# Altium PCB PCB.PcbDoc (part 1 of 2)
Units mil, origin at the board's own origin, x right, y up, seen from the top; angles counter-clockwise.
Board outline 10740 x 3770 mil, 2 copper layers (Top Layer, Bottom Layer); 124 components, 113 nets, 453 pads, 174 vias.
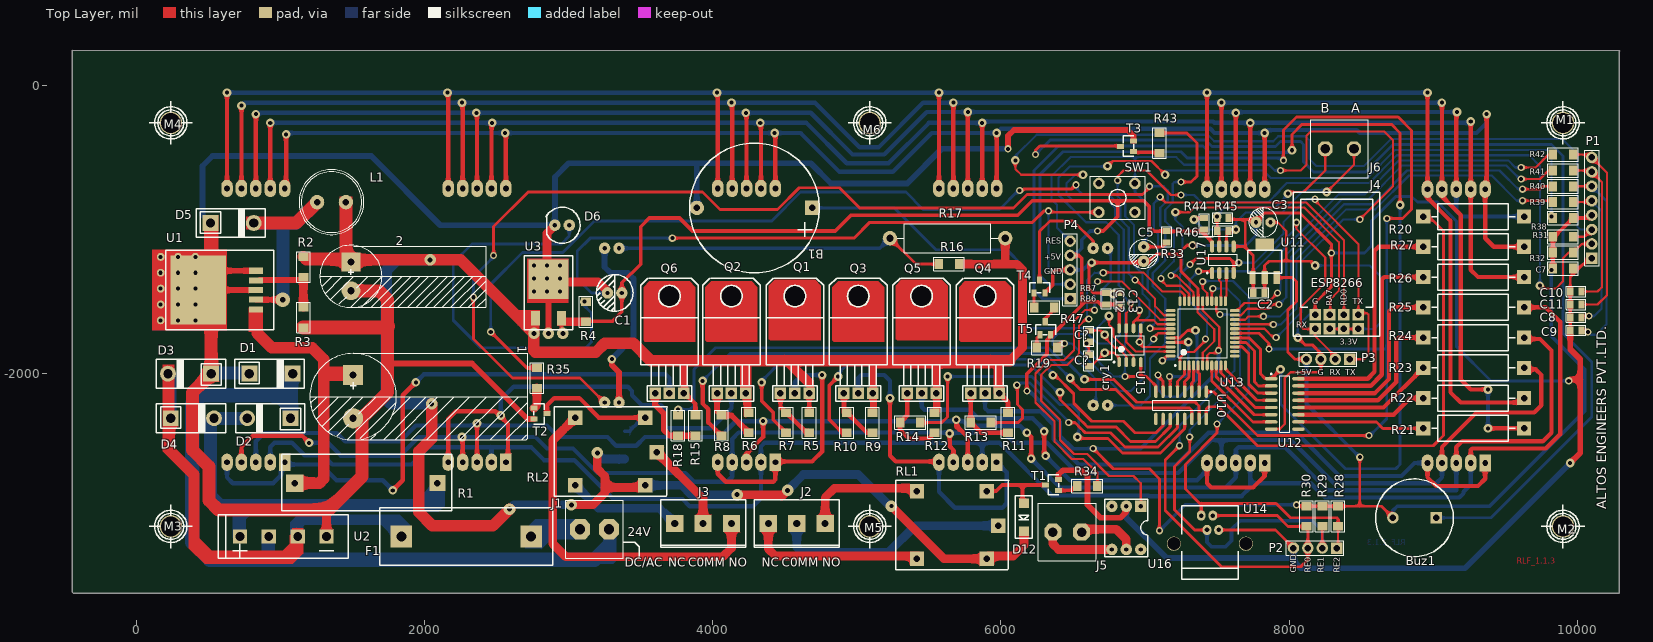
[diagram p0: Top Layer view]
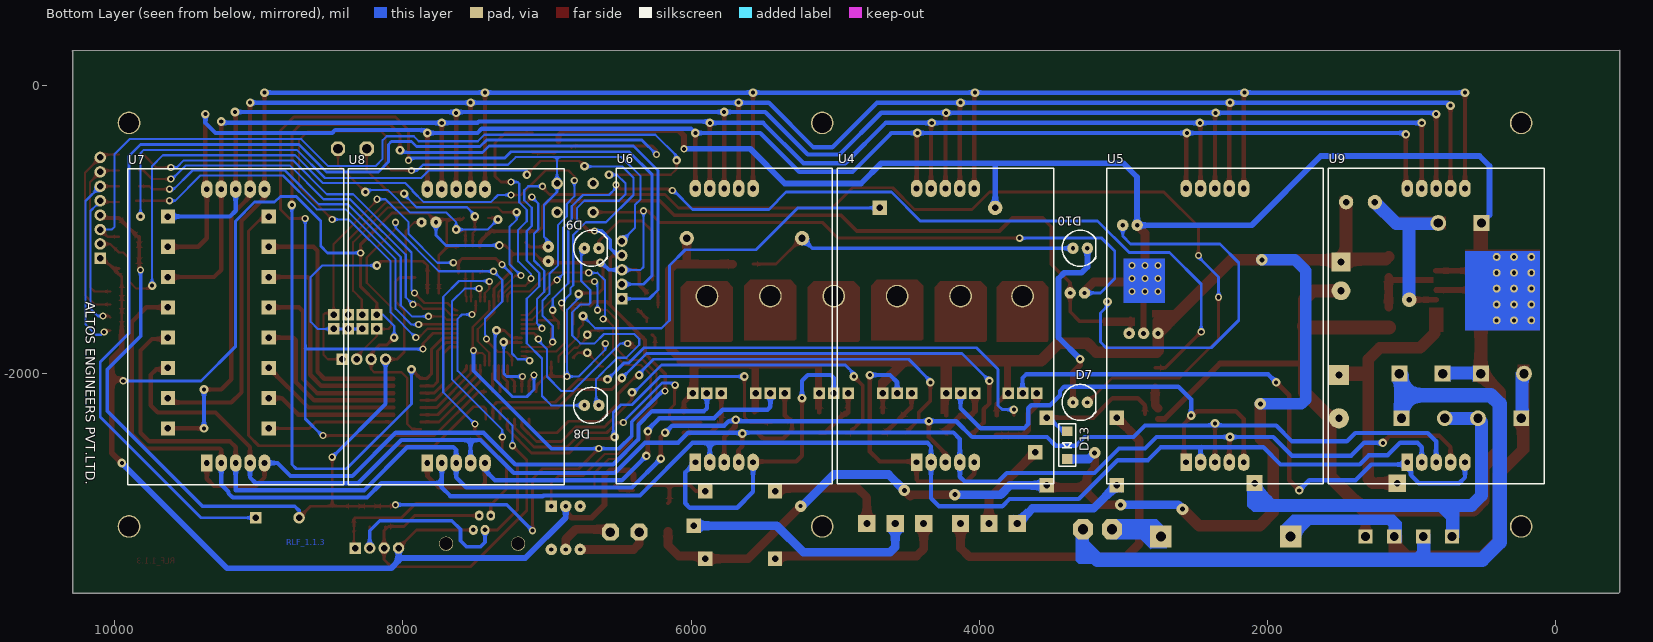
[diagram p1: Bottom Layer view, seen from below]

## Layer stack, top to bottom
Top Solder: solder mask 0.4, Solder Resist, Dk 3.5
Top Layer: signal copper 1.4
Dielectric 1: dielectric 12.6, FR-4, Dk 4.8
Bottom Layer: signal copper 1.4
Bottom Solder: solder mask 0.4, Solder Resist, Dk 3.5

## Board outline
-445,245 -445,-1740 -445,-3515 -435,-3525 9545,-3525 10290,-3525 10290,-2060 10290,235 10295,240

## Design rules (kind name [scope] priority, off if disabled: settings)
Clearance [All] p1: gap=20
PolygonConnect [All] p1: connectstyle=Relief reliefconductorwidth=10 reliefentries=4 polygonreliefangle="90 Angle" airgapwidth=10
RoutingVias [All] p1: holewidth=28 width=60 viastyle="Through Hole" minholewidth=25 minwidth=50 maxholewidth=28 maxwidth=60
SolderMaskExpansion [All] p1: expansion=4
UnpouredPolygon [All] p1: allowunpoured=FALSE
Width [All] p1: maxlimit=180 minlimit=10 preferedwidth=10
29 further rules are at their usual default settings.

## Classes and differential pairs
component class Sheet6: Buz1 C7 C8 C9 C10 C11 D12 D13 J2 J3 J4 J5 J6 P1 R34 R35 R39 R40 R41 R42 R43 R44 R45 R46 RL1 RL2 T1 T2 T3 U16 U17
component class Sheet1: 1 2 C1 D1 D2 D3 D4 D5 D6 D17 D18 F1 J1 L1 M1 M2 M3 M4 M5 M6 R1 R2 R3 R4 U1 U2 U3
component class Sheet2: Q1 Q2 Q3 R5 R6 R7 R8 R9 R10 U4 U5 U6
component class Sheet3: D7 D8 D9 D10 Q4 Q5 Q6 R11 R12 R13 R14 R15 R16 R17 R18 R19 R47 T4 T5 U7 U8 U9
component class Sheet4: C2 C3 R20 R21 R22 R23 R24 R25 R26 R27 U10 U11 U12
component class Sheet5: B1 C5 C12 C13 C? cry1 P2 P3 P4 P6 R28 R29 R30 R31 R32 R33 R38 SW1 U13 U14 U15

## Components (designator, comment, footprint, x,y, rotation, side; value= is the part's Value field where it differs from the comment)
1 "CAP" "Capacitor - 2200uF" 1505,-2160 r270 top
2 "CAP" Capacitor1000uF 1490,-1325 r270 top
B1 "3.3V Battery" CMOS_Battery_H 4290,-850 r180 top
Buz1 "Buzzer" Buzzer 8870,-3000 r180 top
C1 "Cap" CAP_220uF 3320,-1440 r180 top
C2 "Cap" RES0805 7790,-1440 r0 top
C3 "Cap" Capacitor10UF/63V#1 7820,-950 r180 top
C5 "Cap" Capacitor10UF/63V#2 6990,-1170 r270 top
C7 "Cap" 1206 9970,-1270 r180 top
C8 "Cap" RES0805 9990,-1610 r0 top
C9 "Cap" RES0805 9990,-1700 r0 top
C10 "Cap" RES0805 9990,-1430 r0 top
C11 "Cap" RES0805 9990,-1520 r0 top
C12 "Cap" RES0805 6730,-1480 r270 top
C13 "Cap" RES0805 6820,-1480 r270 top
C? "Cap" RES0805 6610,-1740 r270 top
C? "Cap" RES0805 6610,-1910 r90 top
cry1 "cry" Res_150mil 6720,-1780 r270 top
D1 "Diode 5822H" Diode#1 785,-2000 r0 top
D2 "Diode 5822H" Diode#2 1070,-2310 r180 top
D3 "Diode 5822H" Diode#2 520,-2000 r180 top
D4 "Diode 5822H" Diode#2 240,-2310 r0 top
D5 "Diode 5822H" Diode#2 515,-955 r0 top
D6 "LED" LED5MM 2955,-970 r180 top
D7 "LED" LED5MM 3300,-2200 r180 bottom locked
D8 "LED" LED5MM 6690,-2220 r180 bottom locked
D9 "LED" LED5MM 6690,-1130 r180 bottom locked
D10 "LED" LED5MM 3300,-1130 r180 bottom locked
D12 "DIODE-SS14" DO-214AC 6160,-3010 r90 top
D13 "DIODE-SS14" DO-214AC 3390,-2510 r90 bottom
F1 "FUSE" FUSE 2740,-3130 r180 top
J1 "Header2" Header2#1 3080,-3080 r0 top
J2 "Header" "HEADER AC SMALL" 4780,-3040 r180 top
J3 "Header" "HEADER AC SMALL" 4130,-3040 r180 top
J4 "ESP8266" ESP8266 8480,-1590 r0 top
J5 "Header2" Header2#2 6560,-3100 r180 top
J6 "Header2" Header2#3 8250,-440 r0 top
L1 "INDUCTOR_L" inductor-200mil 1355,-810 r0 top
M1 "MH" "Mounting hole" 9900,-260 r0 top locked
M2 "MH" "Mounting hole" 9900,-3060 r0 top locked
M3 "MH" "Mounting hole" 240,-3060 r0 top locked
M4 "MH" "Mounting hole" 240,-260 r0 top locked
M5 "MH" "Mounting hole" 5090,-3060 r0 top locked
M6 "MH" "Mounting hole" 5090,-260 r0 top locked
P1 "Header 8" HDR1X8 10100,-1200 r90 top
P2 "Header 4" HDR1X4 8330,-3210 r180 top
P3 "Header 4" HDR1X4 8420,-1900 r180 top
P4 "Header 5" HDR1X5 6480,-1480 r90 top
Q1 "Trans" 2N6107 4570,-1800 r0 top
Q2 "Trans" 2N6107 4130,-1800 r0 top
Q3 "Trans" 2N6107 5010,-1800 r0 top
Q4 "Trans" 2N6107 5890,-1800 r0 top
Q5 "Trans" 2N6107 5450,-1800 r0 top
Q6 "Trans" 2N6107 3700,-1800 r0 top
R1 "RES-1E/5W" RES-1E/5W 2090,-2760 r180 top
R2 "Res1206" 1206 1160,-1330 r90 top
R3 "Res1206" 1206 1160,-1680 r90 top
R4 "Res1206" 1206 3120,-1500 r270 top
R5 "Res1206" 1206 4670,-2270 r270 top
R6 "Res1206" 1206 4250,-2410 r90 top
R7 "Res1206" 1206 4510,-2270 r270 top
R8 "Res1206" 1206 4060,-2430 r90 top
R9 "Res1206" 1206 5110,-2410 r90 top
R10 "Res1206" 1206 4930,-2410 r90 top
R11 "Res1206" 1206 6050,-2410 r90 top
R12 "Res1206" 1206 5540,-2270 r270 top
R13 "Res1206" 1206 5930,-2340 r180 top
R14 "Res1206" 1206 5300,-2340 r0 top
R15 "Res1206" 1206 3880,-2430 r90 top
R16 "Res1206" 1206 5710,-1240 r180 top
R17 "Res_1W" RES_400_1W 5530,-1060 r0 top
R18 "Res1206" 1206 3760,-2290 r270 top
R19 "Res1206" 1206 6250,-1820 r0 top
R20 "RES-1W" RES-1W 8930,-910 r0 top
R21 "RES-1W" RES-1W 8930,-2380 r0 top
R22 "RES-1W" RES-1W 8930,-2170 r0 top
R23 "RES-1W" RES-1W 8930,-1960 r0 top
R24 "RES-1W" RES-1W 8930,-1750 r0 top
R25 "RES-1W" RES-1W 8930,-1540 r0 top
R26 "RES-1W" RES-1W 8930,-1330 r0 top
R27 "RES-1W" RES-1W 8930,-1120 r0 top
R28 "Res1206" 1206 8340,-3060 r90 top
R29 "Res1206" 1206 8230,-3060 r90 top
R30 "Res1206" 1206 8120,-3060 r90 top
R31 "Res1206" 1206 9970,-1050 r180 top
R32 "Res1206" 1206 9970,-1160 r180 top
R33 "Res" RES0805 7150,-1050 r90 top
R34 "Res1206" 1206 6670,-2780 r180 top
R35 "Res1206" 1206 2780,-1960 r270 top
R38 "Res1206" 1206 9830,-920 r0 top
R39 "Res1206" 1206 9970,-810 r180 top
R40 "Res1206" 1206 9970,-700 r180 top
R41 "Res1206" 1206 9970,-590 r180 top
R42 "Res1206" 1206 9970,-480 r180 top
R43 "Res1206" 1206 7100,-470 r90 top
R44 "Res" RES0805 7410,-960 r270 top
R45 "Res" RES0805 7540,-920 r0 top
R46 "Res" RES0805 7540,-1010 r180 top
R47 "Res1206" 1206 6230,-1540 r0 top
RL1 "Relay" Relay 5700,-3050 r270 top
RL2 "Relay" Relay 3330,-2540 r270 top
SW1 "SWITCH_250-MIL" switch_200/250 6680,-680 r0 top
T1 "BC848" SOT23 6400,-2810 r180 top
T2 "BC848" SOT23 2760,-2240 r0 top
T3 "BC848" SOT23 6920,-460 r180 top
T4 "BC848" SOT23 6230,-1440 r90 top
T5 "BC857" SOT23 6270,-1730 r90 top
U1 "LM2575" D2PAK_5PIN 630,-1420 r90 top
U2 "BRIDGE" BRIDGE_200MIL 1020,-3130 r0 top
U3 "7805" D-PAK 2860,-1480 r0 top
U4 "SSD" SP1802_SSD 4235,-1665 r90 bottom locked
U5 "SSD" SP1802_SSD 2365,-1665 r90 bottom locked
U6 "SSD" SP1802_SSD 5770,-1665 r90 bottom locked
U7 "SSD" SP1802_SSD 9160,-1670 r90 bottom locked
U8 "SSD" SP1802_SSD 7630,-1670 r90 bottom locked
U9 "SSD" SP1802_SSD 830,-1665 r90 bottom locked
U10 "ULN2004AD" D016_N 7250,-2220 r270 top
U11 "Reg" LM1117 7830,-1220 r0 top
U12 "ULN2004AD" D016_N 7970,-2210 r0 top
U13 "PIC16F887T-E/PT" TQFP-PT44_N 7400,-1720 r90 top
U14 "RJ11" RJ11 7450,-3080 r180 top
U15 "DS1307" SOIC1307 6820,-1920 r90 top
U16 "4N35" 4N35 6970,-2920 r270 top
U17 "RS485" RS485 7540,-1210 r90 top

## Footprints (in the part's own frame and the unit in brackets; to place one, negate y for a bottom-side part, rotate by r counter-clockwise, add the part's x,y. Pads: shape width x height; smd on the part's side, far side on the other; paste and mask are expansions set on the pad)
2N6107 [mil]
  round 157.48 hole 137.8: 0(0,337.5)
  rect 80x80 hole 45: 1(-100,-337.5) 2(0,-337.5) 3(100,-337.5)
  silkscreen extent -200,-392 200,462
4N35 [mil]
  rect 80x80 hole 30: 1(0,0)
  round 80 hole 30: 2(0,-100) 3(0,-200) 4(300,-200) 5(300,-100) 6(300,0)
  silkscreen extent -50,-250 350,50
1206 [mm]
  rect 1.504x1.75 smd: 1(0,0) 2(3.556,0)
  silkscreen extent -0.94,-1.2 4.5,1.2
BRIDGE_200MIL [mil]
  rect 100x100 hole 60: 1(-300,0) 2(-100,0) 3(100,0) 4(300,0)
  silkscreen extent -450,-150 450,150
Buzzer [mil]
  rect 80x80 hole 45: 1(-150,0)
  round 80 hole 45: 2(150,0)
  silkscreen extent -269,-269 269,269
CAP_220uF [mil]
  round 80 hole 30: 1(-50,0) 2(50,0)
  silkscreen extent -127,-127 127,127
Capacitor10UF/63V#1 [mil]
  round 70 hole 30: 1(-50,0)
  round 80 hole 30: 2(50,0)
  silkscreen extent -100,-100 100,100
Capacitor10UF/63V#2 [mil]
  round 80 hole 30: 1(-50,0) 2(50,0)
  silkscreen extent -100,-100 100,100
Capacitor1000uF [mil]
  rect 130x130 hole 50: 1(-100,0)
  round 130 hole 50: 2(100,0)
  silkscreen extent -216,-216 216,940
"Capacitor - 2200uF" [mil]
  rect 140x140 hole 50: 1(-150,0)
  round 140 hole 50: 2(150,0)
  silkscreen extent -300,-300 300,1210
CMOS_Battery_H [mil]
  rect 100x100 hole 45: 1(-400,0)
  round 100 hole 45: 2(400,0)
  silkscreen extent -450,-450 450,450
D2PAK_5PIN [mm] "SMD mosfet"
  rect 1.07x2.54 smd: 1(-3.4,-5.1) 2(-1.7,-5.1) 3(0,-5.08) 4(1.7,-5.1) 5(3.4,-5.1)
  rect 12.2x9.75 smd: 3(0,5.08)
  silkscreen extent -6.98,-8.25 6.98,10.79
D016_N [mm] "SOIC, 16-Leads, Body 9.9x3.9mm, Pitch 1.27mm, IPC Medium Density"
  oval 2.2x0.6 smd: 1(-2.4,4.445) 2(-2.4,3.175) 3(-2.4,1.905) 4(-2.4,0.635) 5(-2.4,-0.635) 6(-2.4,-1.905) 7(-2.4,-3.175) 8(-2.4,-4.445) 9(2.4,-4.445) 10(2.4,-3.175) 11(2.4,-1.905) 12(2.4,-0.635) 13(2.4,0.635) 14(2.4,1.905) 15(2.4,3.175) 16(2.4,4.445)
  silkscreen extent -2.52,-5 0.9,5.42, body extent -2,-5 2,5, height 1.75
D-PAK [mm] "78M05"
  rect 1.6x2.5 smd: 1(-2.3,-3.44) 3(2.3,-3.44)
  rect 7x7 smd: 2(0,3.44)
  silkscreen extent -4.3,-5.44 4.3,7.56
Diode#1 [mil]
  rect 110x110 hole 65: 1(0,0) 2(300,0)
  silkscreen extent -100,-100 380,100
Diode#2 [mil]
  rect 110x110 hole 65: 1(0,0)
  round 110 hole 65: 2(300,0)
  silkscreen extent -100,-100 380,100
DO-214AC [mm] "SMD DIODE"
  rect 1.7x1.8 smd: 1(2.8,0) 2(-2.1,0)
  silkscreen extent -3.4,-1.5 4.1,1.5
ESP8266 [mil] "Serial WiFi Module"
  rect 80x80 hole 45: 1(0,0) 2(0,-100) 3(-100,0) 4(-100,-100) 5(-200,0) 6(-200,-100) 7(-300,0) 8(-300,-100)
  silkscreen extent -450,-150 150,850
FUSE [mil]
  rect 150x150 hole 70: 1(0,0) 2(900,0)
  silkscreen extent -150,-200 1050,200
HDR1X4 [mil] "Connector; Header; 4 Position"
  rect 80x80 hole 45: 1(0,0)
  round 80 hole 45: 2(100,0) 3(200,0) 4(300,0)
  silkscreen extent -50,-50 350,50
HDR1X5 [mil] "Connector; Header; 5 Position"
  rect 80x80 hole 45: 1(0,0)
  round 80 hole 45: 2(100,0) 3(200,0) 4(300,0) 5(400,0)
  silkscreen extent -50,-50 450,50
HDR1X8 [mil] "Connector; Header; 8 Position"
  rect 80x80 hole 45: 1(0,0)
  round 80 hole 45: 2(100,0) 3(200,0) 4(300,0) 5(400,0) 6(500,0) 7(600,0) 8(700,0)
  silkscreen extent -50,-50 750,50
Header2#1 [mil]
  oct 140x140 hole 70: 1(0,0) 2(200,0)
  silkscreen extent -100,-200 300,200
Header2#2 [mil]
  oct 118.11x118.11 hole 66.93: 1(0,0) 2(200,0)
  silkscreen extent -100,-200 300,200
Header2#3 [mil]
  oct 100x100 hole 66.93: 1(0,0) 2(200,0)
  silkscreen extent -100,-200 300,200
"HEADER AC SMALL" [mil]
  rect 120x120 hole 50: 1(0,0) 2(196.85,0) 3(393.7,0)
  silkscreen extent -100,-165 492,165
inductor-200mil [mil] "in"
  round 100 hole 45: 1(-100,0) 2(100,0)
  silkscreen extent -225,-225 225,225
LED5MM [mil]
  round 80 hole 30: 1(-50,0) 2(50,0)
  silkscreen extent -125,-125 112,125
LM1117 [mm]
  rect 1.1x2.3 smd: 1(-2.15,-2.9) 2(0,-2.9) 3(2.15,-2.9)
  rect 3.25x2.15 smd: 4(0,2.9)
  silkscreen extent -3,-2.1 3,1.9
"Mounting hole" [mm]
  round 4 hole 3.5: ""(0,0)
  silkscreen extent -3.81,-3.81 3.81,3.81
Relay [mil] "12V"
  rect 100x100 hole 45: 1(-235,202.5) 2(-235,-282.5) 3(235,-282.5) 4(235,202.5) 5(5,282.5)
  silkscreen extent -310,-430 310,353
RES0805 [mm]
  rect 1.1x1.4 smd: 1(-1,0) 2(1,0)
  silkscreen extent -1.75,-0.89 1.77,0.89
RES-1E/5W [mil]
  rect 110x110 hole 45: 1(0,0)
  rect 120x120 hole 45: 2(990,0)
  silkscreen extent -100,-200 1080,190
RES-1W [mm]
  rect 2.5x2.5 hole 1.143: 1(0,0) 2(17.78,0)
  silkscreen extent 1.52,-2.29 16.26,2.29
Res_150mil [mil] "vertical placement"
  round 60 hole 30: 1(-50,0) 2(75,0)
  silkscreen extent -100,-50 125,50
RES_400_1W [mil]
  round 100 hole 50: 1(-300,0) 2(500,0)
  silkscreen extent -250,-100 450,100
RJ11 [mm]
  oval 1.524x1.778 hole 0.8: 1(-1.53,0.12) 2(-0.51,-2.42) 3(0.51,0.12) 4(1.53,-2.42)
  round 2.5 hole 2.3: ""(-6.35,2.54) ""(6.35,2.54)
  silkscreen extent -5,-4.15 5,8.85
RS485 [mm] "S0IC 8PIN"
  oval 2.154x0.752 smd: 1(-2.35,1.905) 2(-2.35,0.635) 3(-2.35,-0.635) 4(-2.35,-1.905) 5(2.35,-1.905) 6(2.35,-0.635) 7(2.35,0.635) 8(2.35,1.905)
  silkscreen extent -2.47,-2.5 1,2.88, body extent -1.95,-2.45 1.95,2.45, height 1.75
SOIC1307 [mm] "SOIC, 8-Leads, Body 4.50x4.00mm, Pitch 1.27mm, IPC Medium Density"
  oval 1.75x0.65 smd: 1(0,0) 2(0,-1.27) 3(0,-2.54) 4(0,-3.81) 5(5.95,-3.81) 6(5.95,-2.54) 7(5.95,-1.27) 8(5.95,0)
  silkscreen extent -0.12,-4.41 4.67,1, body extent 0.87,-4.41 5.07,0.6, height 2.65
SOT23 [mil] "SMD DIODE 4148"
  rect 50x35 smd: 1(0,0) 2(0,-75) 3(90,-37.5)
  silkscreen extent 0,-110 70,30
SP1802_SSD [mil]
  rect 120x80 hole 40: 1(-950,200)
  oval 120x80 hole 40: 2(-950,100) 3(-950,0) 4(-950,-100) 5(-950,-200) 6(950,-200) 7(950,-100) 8(950,0) 9(950,100) 10(950,200)
  silkscreen extent -1100,-750 1090,750
switch_200/250 [mil]
  round 80 hole 45: 1(0,0) 2(0,-200) 3(250,-200) 4(250,0)
  silkscreen extent -60,-250 320,50
TQFP-PT44_N [mm] "Thin QFP, 44-Leads, Body 10x10mm, Pitch 0.8mm, IPC Medium Density"
  oval 1.75x0.55 smd: 1(-5.65,4) 2(-5.65,3.2) 3(-5.65,2.4) 4(-5.65,1.6) 5(-5.65,0.8) 6(-5.65,0) 7(-5.65,-0.8) 8(-5.65,-1.6) 9(-5.65,-2.4) 10(-5.65,-3.2) 11(-5.65,-4) 23(5.65,-4) 24(5.65,-3.2) 25(5.65,-2.4) 26(5.65,-1.6) 27(5.65,-0.8) 28(5.65,0) 29(5.65,0.8) 30(5.65,1.6) 31(5.65,2.4) 32(5.65,3.2) 33(5.65,4)
  oval 0.55x1.75 smd: 12(-4,-5.65) 13(-3.2,-5.65) 14(-2.4,-5.65) 15(-1.6,-5.65) 16(-0.8,-5.65) 17(0,-5.65) 18(0.8,-5.65) 19(1.6,-5.65) 20(2.4,-5.65) 21(3.2,-5.65) 22(4,-5.65) 34(4,5.65) 35(3.2,5.65) 36(2.4,5.65) 37(1.6,5.65) 38(0.8,5.65) 39(0,5.65) 40(-0.8,5.65) 41(-1.6,5.65) 42(-2.4,5.65) 43(-3.2,5.65) 44(-4,5.65)
  silkscreen extent -5.77,-4.35 4.35,4.95, body extent -5,-5 5,5, height 1.2

## Part data
1 2: library part 2200uF/50V
B1: library part "CMOS Battery_H", "3.3V"
C1: library part CAP_220uF, "Cap_220uF"
C2 C7 C8 C9 C10 C11 C12 C13 C? C?: library part CAP_104_SMD, "Cap_104_SMD"
C3 C5: library part Cap-10uf/63V, "Cap10uf/63V"
cry1: library part "Res vertical placement", "Res vertical placement"
D6 D7 D8 D9 D10: library part LED_5MM, "LED_5MM"
D12 D13: "SS14"
F1: "Fuse"
J2 J3: library part "HEADER AC SMALL"
J4: "WIFI Module"
L1: library part Inductor-200, "Inductor-200"
P1: "Header, 8-Pin"
P2 P3: "Header, 4-Pin"
P4: "Header, 5-Pin"
Q1 Q2 Q3 Q4 Q5 Q6: library part 2N6107, "pnp transistor"
R33 R44 R45 R46: library part Resistor, "Res0805"
RL1 RL2: "Relay 12V"
SW1: "200/250mil Didtance"
T1 T2 T3 T4: "TRANSISTOR"
U1 U3: "Vol Reg"
U4 U5 U6 U7 U8 U9: library part SP1802, "SSD 48MM"
U10 U12: "Darlington Transistor Array"
U11: library part LM1117
U13: "Flash-Based, 8-Bit CMOS Microcontroller with nanoWatt Technology, 8K (x14-Bit words) Program Memory, 624 Bytes Data Memory, 35 I/O pins, 44-Pin TQFP, Standard VDD Range, Extended Temperature, Tape and Reel"
U14: library part "RJ11 conn", "RJ11 conn"
U16: "Optocoupler"
U17: "8-Pin SO"

## Free pads (board coordinates)
  round 55 hole 28: 0(170,-1630) 0(170,-1520) 0(170,-1410) 0(170,-1300) 0(170,-1190) 1(290,-1630) 1(290,-1520) 1(290,-1410) 1(290,-1300) 1(290,-1190) 2(410,-1630) 2(410,-1520) 2(410,-1410) 2(410,-1300) 2(410,-1190)
  round 80 hole 35: 3(2760,-1720) 4(2860,-1720) 5(2960,-1720)

## Via types
v1: diameter 60, hole 28, Top Layer to Bottom Layer, 82 vias
v2: diameter 50, hole 28, Top Layer to Bottom Layer, 81 vias
v3: diameter 80, hole 35, Top Layer to Bottom Layer, 7 vias
v4: diameter 60, hole 35, Top Layer to Bottom Layer, 1 vias
v5: diameter 80, hole 28, Top Layer to Bottom Layer, 1 vias
v6: diameter 100, hole 40, Top Layer to Bottom Layer, 1 vias
v7: diameter 50, hole 28, Top Layer to Bottom Layer, tented bottom, 1 vias

## Nets (pads, with @x,y where several pads share a name; then routed paths per layer and width w, separated by ;. In a path a pad name is that pad's centre, name@x,y a point inside that pad or via, vN(x,y) a via of type N, cw(c..) or ccw(c..) an arc to the next point about the centre after c; other vN are vias at no path point)
3V: C2.2 C3.1 J4.2 J4.4 J4.6 U11.2 | length 2253.8
  Top Layer w15: C3.1@7870,-950 7920,-950 7980,-1010 7980,-1220 ; 8320,-1690 J4.4@8380,-1690 J4.2@8480,-1690
  Top Layer w20: C2.2@7829.37,-1440 7829.37,-1250.63 7860,-1220 7980,-1220 8150,-1220 v1(8180,-1250)
  Bottom Layer w15: v1(8180,-1250) 8560,-1250 8640,-1330 8640,-1640 8590,-1690 J4.2@8480,-1690 J4.4@8380,-1690 J4.6@8280,-1690
12V: 2.1 D12.2 D13.2 L1.2 pad.3 Q1.3 Q2.3 Q3.3 Q4.3 Q5.3 Q6.3 R2.2 R5.1 R6.2 R9.2 R11.2 R12.1 R15.2 R16.1 R17.2 RL1.4 RL2.4 U3.1 | length 18157.5
  Top Layer w30: 3800,-2000 Q6.3@3800,-2137.5 3807.5,-2137.5 3880,-2210 R15.2@3880,-2290 ; R6.2@4230,-2290 Q2.3@4230,-2137.5 ; 4230,-2010 4230,-1950 ; 4500,-1910 4670,-2080 Q1.3@4670,-2137.5 R5.1@4670,-2270 ; R9.2@5110,-2270 Q3.3@5110,-2137.5 5110,-1960 5120,-1950 5560,-1950 ; R12.1@5560,-2270 5550,-2260 Q5.3@5550,-2137.5 5550,-1960 5560,-1950 ; 5930,-1950 5560,-1950 ; Q4.3@5990,-2137.5 6050,-2197.5 R11.2@6050,-2270
  Top Layer w60: R2.2@1160,-1190 2.1@1455,-1190 ; v3(3020,-2910) 3170,-2910 3250,-2830 3250,-2790 ; v3(3200,-2550) 3200,-2660 3250,-2710 3250,-2790 ; RL2.4@3532.5,-2775 3517.5,-2790 3250,-2790 ; v3(4170,-2840) 4470,-2840 4480,-2850 v3(4520,-2810) ; v5(5240,-2920) 5605,-3285 RL1.4@5902.5,-3285 ; R16.1@5710,-1240 6020,-1240 ; RL1.4@5912.5,-3265 6085,-3265 6160,-3190 D12.2@6160,-3092.68 ; 5930,-1910 5960,-1940 5980,-1940 5980,-2127.5 Q4.3@5990,-2137.5 ; R17.2@6030,-1060 6030,-1230 6020,-1240 ; 6060,-1910 6150,-1820 6150,-1280 6110,-1240 6020,-1240
  Top Layer w80: R2.2@1160,-1190 1180,-1210 2.1@1490,-1210 ; L1.2@1455,-810 1455,-1175 2.1@1490,-1210 ; 2.1@1490,-1225 2.1@1490,-1210 ; v3(2050,-2210) 2050,-2450 1960,-2540 1960,-2960 2055,-3055 2475,-3055 v3(2590,-2940) ; 2717.44,-1677.44 2675.43,-1635.43 ; pad.3@2755.28,-1724.72 2755.28,-1715.28 2675.43,-1635.43 ; U3.1@2759.45,-1635.43 2759.45,-1839.45 2770,-1850 3190,-1850 3250,-1790 3450,-1790 3570,-1910 4500,-1910 5930,-1910 6060,-1910 ; Q2.3@4230,-2137.5 4230,-2010 ; 2.1@1490,-1210 v3(2040,-1210) 2250,-1210 2675.43,-1635.43
  Bottom Layer w60: v3(2590,-2940) 2620,-2910 v3(3020,-2910) ; v3(3200,-2550) 3242.68,-2592.68 D13.2@3390,-2592.68 ; RL2.4@3532.5,-2775 3786.92,-2775 3851.92,-2840 4180,-2840 4170,-2830 v3(4170,-2840) ; v3(4520,-2810) 4630,-2700 5010,-2700 v5@5235,-2925
  Bottom Layer w80: v3(2040,-1210) 1810,-1210 1735,-1285 1735,-2180 1765,-2210 v3(2050,-2210)
24V: D2.2 D4.2 R1.1 U2.1 | length 2687.2
  Bottom Layer w30: U2.1@720,-3130 720,-3030 805,-2945
  Bottom Layer w90: D2.2@770,-2310 D4.2@540,-2310 515,-2335 515,-2845 585,-2915 1975,-2915 2090,-2800 R1.1@2090,-2760
+5: Buz1.2 C1.1 C7.2 C12.2 C13.2 P1.4 P3.4 P4.4 pad.5 R4.2 R28.2 R29.2 R30.2 R31.2 R32.2 R33.2 R38.2 R44.2 T5.2 U3.3 U11.3 U13.7 U13.28 U15.8 U17.8 | length 18129.4
  Top Layer w15: U13.28@7400,-1497.56 7400,-1561.82 7515,-1676.82 7515,-1835 v2(7510,-1840) 7492.5,-1857.5 7447.5,-1857.5 7431.5,-1873.5 U13.7@7431.5,-1942.44
  Top Layer w20: v2(6640,-2520) 6780,-2660 7030,-2660 7100,-2730 v2(7100,-3090) ; U11.3@7914.65,-1334.17 8024.17,-1334.17 8050,-1360 8050,-1500 7990,-1560 7990,-1850 8040,-1900 P3.4@8120,-1900 ; v2(8050,-2910) 8060,-2920 R30.2@8120,-2920 R29.2@8230,-2920 R28.2@8340,-2920 8490,-2920 ; v2(8490,-2580) 8490,-2920 ; Buz1.2@8720,-3000 8640,-2920 8490,-2920
  Top Layer w25: U3.3@2940.55,-1635.43 U3.3@2950.55,-1635.43 ; U3.3@2950.55,-1615.43 U3.3@2950.55,-1635.43 ; pad.5@2960,-1720 2950.55,-1710.55 U3.3@2950.55,-1635.43 ; v2(6180,-2120) 6180,-2002.62 6286.99,-1895.63 ; 6290.52,-1890.48 6311.01,-1870 6312.62,-1870 6320,-1862.62 6320,-1766.26 6560,-1526.26 ; P4.4@6480,-1180 6540,-1180 6560,-1200 6560,-1525.75 6584.64,-1501.12 6674.25,-1501.12 6700,-1526.87 6700,-1519.37 C12.2@6730,-1519.37 C13.2@6820,-1519.37 U15.8@6820,-1655.75 ; v2(6670,-1010) 6710,-1010 6810,-910 6810,-800 ; U17.8@7465,-1117.48 7465,-1085 7390.63,-1010.63 7387.76,-1010.63 7385.89,-1012.5 7151.87,-1012.5 R33.2@7150,-1010.63 7060.63,-1010.63 7030,-980 7030,-840 6990,-800 6810,-800 ; v2(9820,-1280) C7.2@9830,-1270 R32.2@9830,-1160 R31.2@9830,-1050 9840,-1050 R38.2@9970,-920 10080,-920 P1.4@10100,-900 ; U3.3@2950.55,-1635.43 3304.57,-1635.43 3370,-1570 C1.1@3370,-1440 3370,-1370 3500,-1240 3500,-980 3560,-920 3770,-920 3860,-1010 4850,-1010 4960,-900 6117.5,-900 6217.5,-800 6810,-800
  Bottom Layer w25: v2(6180,-2120) 6197.68,-2120 6412.5,-2334.82 6412.5,-2432.5 6500,-2520 v2(6640,-2520) 6970,-2520 7510,-1980 v2(7510,-1840) ; P4.4@6480,-1180 6510,-1180 6560,-1130 6560,-1070 6620,-1010 v2(6670,-1010) ; v2(7100,-3090) 7280,-2910 v2(8050,-2910) ; P3.4@8120,-1900 8120,-2210 v2(8490,-2580) ; Buz1.2@8720,-3000 8720,-2950 8750,-2920 9390,-2920 10050,-2260 10050,-1970 9820,-1740 v2(9820,-1280)
A: J6.2 R44.1 R46.1 U17.6 | length 1793.5
  Top Layer w15: v1(7340,-930) v1@7358.74,-930 ; v1@7360,-931.26 7349.37,-920.63 R44.1@7410,-920.63 ; U17.6@7565,-1117.48 R46.1@7565,-1004.37 ; R46.1@7579.37,-1010 7650,-1010 7640,-1000 v1(7630,-1000) ; v1@8250,-750 v1(8260,-740) 8450,-550 J6.2@8450,-440
  Bottom Layer w15: v1(7340,-930) 7410,-1000 v1(7630,-1000) 7630,-950 7697.5,-882.5 7947.5,-882.5 8105,-725 8245,-725 v1(8260,-740)
B: J6.1 R45.1 R46.2 U17.7 | length 1261.5
  Top Layer w15: R45.1@7500.63,-920 7500.63,-990 7490.63,-1000 7515,-1024.37 U17.7@7515,-1117.48 ; v1(7990.66,-750.66) 8001.32,-740 8100,-740 8250,-590 J6.1@8250,-440
  Bottom Layer w15: v1(7500,-910) 7500,-900 7555,-845 7905,-845 7980,-770 v1@7980,-740
DE: U13.23 U17.3 | length 198.2
  Top Layer w15: U13.23@7557.48,-1497.56 7557.48,-1467.52 7565,-1460 U17.3@7565,-1302.52
GND: 1.2 2.2 B1.2 C1.2 C2.1 C3.2 C5.2 C7.1 C8.1 C9.1 C10.1 C11.1 C12.1 C13.1 C?.2 D1.1 D3.1 D5.1 D6.2 J4.7 P1.1 P2.4 P3.3 P4.3 pad.0 pad.1 pad.2 pad.4 R3.1 R45.2 SW1.2 T1.2 T2.2 T3.2 T4.2 U1.3 U1.5 U2.4 U3.2 U10.8 U11.1 U12.8 U13.6 U13.29 U14.1 U15.4 U16.2 U17.5 | length 39319.5
  Top Layer w15: C?.2@6610,-1870.63 v2@6610,-1805 ; v1(6780,-1447.72) v1@6780,-1440.63 ; 7365,-1547.39 7365,-1576.32 7480,-1691.32 7480,-1774.25 7400,-1854.25 U13.6@7400,-1942.44
  Top Layer w16: U12.8@7875.51,-2385 7935,-2385 7970,-2350 7970,-2030 8010,-1990 8200,-1990 8220,-1970 P3.3@8220,-1900
  Top Layer w20: U3.2@2850,-1364.57 2860,-1374.57 pad.4@2860,-1720 ; v2(3720,-1060) 4980,-1060 5090,-950 6220,-950 6300,-870 v2(6330,-870) ; v2@6330,-880 SW1.2@6680,-880 ; v1(6630,-1230) 6610,-1250 6610,-1410 6640.63,-1440.63 C12.1@6730,-1440.63 v1@6780,-1440.63 ; v2(6860,-2020) 6970,-2020 ; U15.4@6970,-1920 6970,-2020 ; C5.2@6990,-1220 7030,-1220 7080,-1170 7250,-1170 ; U10.8@7075,-2125.51 7075,-2085 7010,-2020 6970,-2020 ; v4(7330,-1110) 7290,-1110 7250,-1150 7250,-1170 ; 7368.5,-1547.39 U13.29@7368.5,-1497.56 7368.5,-1408.5 7250,-1290 7250,-1170 ; U14.1@7510.24,-3084.72 7904.72,-3084.72 P2.4@8030,-3210 ; R45.2@7579.37,-920 7589.37,-930 7680,-930 ; U17.5@7615,-1117.48 7687.48,-1117.48 7695,-1125 ; C2.1@7750.63,-1440 7750.63,-1180.63 7695,-1125 ; v1(8060,-1750) 8110,-1800 8160,-1800 8220,-1860 P3.3@8220,-1900 ; J4.7@8180,-1590 8180,-1510 8292.5,-1397.5 v2(8292.5,-1162.5) 8292.5,-1102.5 8075,-885 7830,-885 7770,-945 C3.2@7770,-950 7750,-930 7680,-930 ; C9.1@9950.63,-1700 C8.1@9950.63,-1610 C11.1@9950.63,-1520 C10.1@9950.63,-1430 9950.63,-1329.37 10010,-1270 ; C7.1@9970,-1270 10010,-1270 ; P1.1@10100,-1200 10080,-1200 10010,-1270 ; 7680,-930 7695,-945 7695,-1125
  Top Layer w25: T4.2@6305,-1440 6360,-1385 6360,-1300 6380,-1280 P4.3@6480,-1280 ; v1(6630,-1230) 6980,-1230 C5.2@6990,-1220
  Top Layer w40: D5.1@515,-955 U1.3@515,-1335 ; U1.3@830,-1420 U1.3@430,-1420 U1.3@515,-1335 ; U1.5@830.79,-1286.14 563.86,-1286.14 U1.3@515,-1335 ; 1760,-1930 2330,-1930 2715,-2315 T2.2@2760,-2315 ; v2(6050,-440) 6050,-350 6090,-310 6880,-310 6920,-350 T3.2@6920,-385 ; T1.2@6400,-2735 6400,-2700 6430,-2670 6560,-2670 6600,-2710 6600,-2910 6690,-3000 6830,-3000 6870,-2960 U16.2@6870,-2920 ; v2(9940,-2050) 9950,-2040 10020,-2040 ; v1(9950,-2620) 10020,-2550 10020,-2040 ; C9.1@9950.63,-1700 9950.63,-1830.63 10020,-1900 10020,-2040
  Top Layer w60: U1.3@430,-1420 520,-1510 U1.3@520,-1600 ; U2.4@1320,-3130 1320,-2960 1335,-2945 ; U3.2@2850,-1364.57 3205.43,-1364.57 3270,-1429.13 C1.2@3270,-1440 ; v2(2850,-1340) 2850,-1025 D6.2@2905,-970
  Top Layer w90: U1.3@520,-1600 D3.1@520,-2000 390,-2130 390,-2530 505,-2645 505,-2880 570,-2945 1335,-2945 1565,-2715 1565,-2310 1745,-2130 1745,-1670 1745,-1485 1685,-1425 2.2@1490,-1425
  Top Layer w100: R3.1@1160,-1680 1735,-1680 1745,-1670
  Bottom Layer w15: v2(6330,-870) 6330,-1260 6350,-1280 P4.3@6480,-1280 ; v2(6595,-1790) 6595,-1835 6780,-2020 v2(6860,-2020) 6860,-1556.75 6780,-1476.75 v1(6780,-1447.72) ; v1(8060,-1750) 8060,-1670 8140,-1590 J4.7@8180,-1590
  Bottom Layer w20: C1.2@3270,-1440 3160,-1440 3060,-1340 3060,-1150 3150,-1060 v2(3720,-1060) ; v4(7330,-1110) 7700,-1110 7770,-1040 C3.2@7770,-950 ; v2(8292.5,-1162.5) 8522.5,-1162.5 8570,-1115 8570,-940 8740,-770 8850,-770 8890,-810 9030,-810 9160,-940 9160,-1810 9400,-2050 v2(9940,-2050)
  Bottom Layer w25: P4.3@6480,-1280 6570,-1280 6620,-1230 v1(6630,-1230)
  Bottom Layer w40: D5.1@515,-955 460,-900 460,-560 530,-490 1630,-490 2110,-970 D6.2@2905,-970 2905,-635 3000,-540 4680,-540 4820,-680 5350,-680 5590,-440 v2(6050,-440) ; B1.2@3890,-850 3890,-550 ; U16.2@6870,-2920 6870,-3000 7150,-3280 8010,-3280 8030,-3300 ; P2.4@8030,-3210 8030,-3300 ; v1(9950,-2620) 9220,-3350 8080,-3350 8030,-3300
  Bottom Layer w60: D3.1@520,-2000 D1.1@785,-2000
  other v2: 2760,-1430 2850,-1430 2940,-1430 2760,-1340 2940,-1340 2760,-1250 2850,-1250 2940,-1250
MCLR: C5.1 P4.5 R33.1 SW1.4 U13.18 | length 6151.7
  Top Layer w15: U13.18@7622.44,-1688.5 7828.5,-1688.5 7890,-1750 v2(7910,-1750) ; v2(7940,-590) 8080,-590 8120,-550 8120,-350 8150,-320 8660,-320 8720,-380 8720,-700 v2(8490,-930)
  Top Layer w20: C5.1@6990,-1120 7119.37,-1120 R33.1@7150,-1089.37
  Bottom Layer w15: P4.5@6480,-1080 6390,-990 6390,-830 6350,-790 6350,-630 6482.5,-497.5 6930,-497.5 ; C5.1@6990,-1120 6990,-1080 7020,-1050 7020,-830 6930,-740 SW1.4@6930,-680 6930,-497.5 ; v2(7910,-1750) 8085,-1575 8085,-1220 8375,-930 v2(8490,-930) ; v2(7940,-590) 7900,-590 7860,-550 7270,-550 7217.5,-497.5 6930,-497.5
NC: J3.3 RL2.3 | length 798.6
  Bottom Layer w60: RL2.3@3047.5,-2775 3207.5,-2935 3631.3,-2935 J3.3@3736.3,-3040
NC1: J2.3 RL1.3 | length 1237.7
  Top Layer w60: J2.3@4386.3,-3040 4386.3,-3216.3 4435,-3265 RL1.3@5427.5,-3265
Net1_1: 1.1 R1.2 U1.1 | length 1717
  Top Layer w80: 840,-1580 840,-1720 940,-1820 1220,-1820 1300,-1900 1300,-2730 1270,-2760 R1.2@1100,-2760
NetB1_1: B1.1 U15.3 | length 3054.2
  Top Layer w15: v1(6750,-1600) 6750,-1660 6779.7,-1689.7 6779.7,-1724.39 6780,-1724.68 6780,-1740.5 6889.75,-1850.25 ; 6890,-1850 6920,-1880 U15.3@6920,-1920
  Bottom Layer w15: 6150,-1630 6205,-1685 6665,-1685 v1(6750,-1600)
  Bottom Layer w20: B1.1@4690,-850 5260,-850 5550,-1140 6040,-1140 6150,-1250 6150,-1630
NetBuz1_1: Buz1.1 T3.3 | length 7910.5
  Top Layer w20: v2(6240,-480) 6240,-450 6270,-420 6820,-420 6830,-430 T3.3@6830,-422.5
  Bottom Layer w20: v2(6240,-480) 6340,-380 7418.67,-380 7463.67,-425 7905,-425 7940,-390 8080,-390 8100,-410 8100,-530 8170,-600 8530,-600 8720,-410 9820,-410 9900,-490 9900,-1720 10100,-1920 10100,-2300 9400,-3000 Buz1.1@9020,-3000
NetC8_2: C8.2 P1.5 R39.1 | length 1068.5
  Top Layer w15: R39.1@9970,-810 P1.5@10090,-810 ; C8.2@10029.37,-1610 10039.37,-1600 v2(10080,-1600)
  Bottom Layer w15: v2(10080,-1600) 10117.5,-1600 10167.5,-1550 10167.5,-872.04 10127.96,-832.5 10115,-832.5 10115,-815 P1.5@10100,-800
NetC9_2: C9.2 P1.6 R40.1 | length 1345.5
  Top Layer w15: R40.1@9970,-700 P1.6@10100,-700 ; C9.2@10029.37,-1700 10060.75,-1700 v2(10072.5,-1711.75)
  Bottom Layer w15: v2(10072.5,-1711.75) 10090.75,-1730 10130,-1730 10202.5,-1657.5 10202.5,-802.5 P1.6@10100,-700
NetC10_2: C10.2 P1.7 R41.1 | length 1116.2
  Top Layer w15: R41.1@9970,-590 10090,-590 P1.7@10100,-600 10170,-670 10170,-1400 10140,-1430 C10.2@10029.37,-1430
NetC11_2: C11.2 P1.8 R42.1 | length 1339.3
  Top Layer w15: R42.1@9970,-480 10080,-480 P1.8@10100,-500 10205,-605 10205,-1455 10140,-1520 C11.2@10029.37,-1520
NetC?_1: C?.1@6610,-1949.37 cry1.2 U15.1 | length 263.6
  Top Layer w15: C?.1@6610,-1949.37 6625.63,-1949.37 cry1.2@6720,-1855 6785,-1855 U15.1@6820,-1890
NetC?_1: C?.1@6610,-1700.63 cry1.1 U15.2 | length 386
  Top Layer w15: C?.1@6610,-1700.63 6690.63,-1700.63 cry1.1@6720,-1730 6720,-1750 6790,-1820 6810,-1820 6870,-1880 U15.2@6870,-1920
NetD1_2: D1.2 D2.1 J1.2 U2.2 | length 5528.4
  Bottom Layer w30: 920,-3270 U2.2@920,-3130 ; 3280,-3190 J1.2@3280,-3080
  Bottom Layer w60: D2.1@1070,-2310 1085,-2295 D1.2@1085,-2000
  Bottom Layer w100: D2.1@1070,-2310 1070,-2150 ; D1.2@1085,-2000 1070,-2015 1070,-2150 ; 3280,-3190 3180,-3290 510,-3290 390,-3170 390,-2210 450,-2150 1070,-2150
NetD3_2: D3.2 D4.1 F1.2 U2.3 | length 2990.2
  Top Layer w60: D4.1@240,-2310 240,-2530 410,-2700 410,-3180 520,-3290 1040,-3290 1120,-3210 U2.3@1120,-3130
  Bottom Layer w30: U2.3@1120,-3130 1120,-3070 1170,-3020 1690,-3020 F1.2@1840,-3170
  Bottom Layer w60: D3.2@220,-2000 220,-2290 D4.1@240,-2310
NetD5_2: D5.2 L1.1 U1.2 | length 1919.3
  Top Layer w40: D5.2@815,-965 D5.2@815,-955 ; U1.2@830.79,-1486.93 v6(1016.93,-1486.93)
  Top Layer w90: D5.2@815,-955 1110,-955 L1.1@1255,-810
  Bottom Layer w40: D5.2@815,-955 820,-950 980,-950 1020,-990
  Bottom Layer w90: D5.2@820,-950 830,-960 1105,-960 L1.1@1255,-810 ; v6(1016.93,-1486.93) 1016.93,-993.07 1020,-990
NetD6_1: D6.1 R4.1 | length 2722.6
  Top Layer w20: v1(3110,-1500) R4.1@3120,-1500
  Bottom Layer w20: D6.1@3005,-970 3005,-1045 2950,-1100 2330,-1100 2200,-1230 2200,-1630 2390,-1820 3120,-1820 3160,-1780 3160,-1580 3110,-1530 v1(3110,-1500)
NetD7_1: D7.1 D10.2 | length 1306
  Top Layer w40: v1(3300,-1900) 3300,-1940 3350,-1990 D7.1@3350,-2200
  Bottom Layer w40: D10.2@3250,-1130 3250,-1260 3290,-1300 3410,-1300 3450,-1340 3450,-1750 v1(3300,-1900)
NetD7_2: D7.2 D8.1 | length 8887.5
  Top Layer w20: v2(2340,-1470) 2340,-1760 2610,-2030 3080,-2030 D7.2@3250,-2200 ; v2(2480,-1180) 2480,-980 2720,-740 3930,-740 4050,-860 4450,-860 4600,-710 4880,-710 5020,-850 6087.78,-850 6180.28,-757.5 6982.5,-757.5 7030,-710 v2(7030,-700)
  Bottom Layer w15: D7.2@3220,-2200 D7.2@3250,-2200 ; D8.1@6740,-2220 6970,-2220 7035,-2155 7035,-1895 7140,-1790 7140,-1480 7053.51,-1393.51 7053.51,-1301.49 7140,-1215 7140,-1010 7139.5,-1010 7105,-975.5 7105,-849.25 7157.5,-796.75 7157.5,-727.5 7130,-700 v2(7030,-700)
  Bottom Layer w20: v2(2340,-1470) 2340,-1330 2480,-1190 v2(2480,-1180)
NetD8_2: D8.2 D9.1 | length 1884.8
  Bottom Layer w15: D8.2@6640,-2220 6660,-2200 6660,-2039.5 6637.5,-2017 6637.5,-2016.18 6573.82,-1952.5 6573,-1952.5 6510.5,-1890 6450,-1890 6360,-1800 6360,-1760 6395,-1725 6604.25,-1725 6669.25,-1790 6770,-1790 6825,-1735 6825,-1575 6770,-1520 6710,-1520 6700,-1510 6700,-1420 6762.5,-1357.5 6762.5,-1152.5 D9.1@6740,-1130
NetD9_2: D9.2 T4.3 | length 848
  Top Layer w20: T4.3@6267.5,-1350 6267.5,-1012.5 6340,-940 6500,-940 6640,-1080 D9.2@6640,-1130
NetD10_1: D10.1 R16.2 R17.1 | length 2323.6
  Top Layer w20: R17.1@5230,-1060 5410,-1240 R16.2@5570,-1240
  Bottom Layer w25: D10.1@3350,-1130 5160,-1130 R17.1@5230,-1060
NetD12_1: D12.1 RL1.1 T1.3 | length 556.5
  Top Layer w25: RL1.1@5902.5,-2815 5967.5,-2815 6010,-2772.5 6150,-2772.5 ; D12.1@6160,-2899.76 6150,-2889.76 6150,-2772.5 ; T1.3@6310,-2772.5 6150,-2772.5
NetD13_1: D13.1 RL2.1 T2.3 | length 998.4
  Top Layer w30: T2.3@2850,-2277.5 2850,-2220 2900,-2170 3075,-2170 3210,-2305 RL2.1@3532.5,-2305
  Bottom Layer w25: D13.1@3390,-2399.76 3420.24,-2399.76 3515,-2305 RL2.1@3532.5,-2305
NetF1_1: F1.1 J1.1 | length 377.3
  Bottom Layer w30: F1.1@2740,-3170 2830,-3080 J1.1@3080,-3080
NetJ2_2: J2.2 RL1.5 | length 1654.4
  Bottom Layer w60: J2.2@4583.15,-3040 4583.15,-3203.15 4620,-3240 5220,-3240 5405,-3055 RL1.5@5982.5,-3055
NetJ3_2: J3.2 RL2.5 | length 627.8
  Top Layer w60: RL2.5@3612.5,-2545 3933.15,-2865.65 J3.2@3933.15,-3040
NetJ5_1: J5.1 U16.5 | length 417.3
  Top Layer w60: J5.1@6560,-3100 6580,-3080 6800,-3080 6870,-3150 U16.5@6870,-3220
NetJ5_2: J5.2 U16.4 | length 506.6
  Top Layer w60: J5.2@6360,-3100 6360,-3180 6400,-3220 U16.4@6770,-3220
NetQ1_1: Q1.1 R5.2 R7.1 | length 367.1
  Top Layer w30: Q1.1@4470,-2137.5 4470,-2230 4650,-2410 R5.2@4670,-2410
NetQ1_2: Q1.2 U4.1 U4.5 | length 1803.3
  Top Layer w30: U4.5@4035,-2615 4035,-2695 4090,-2750 4420,-2750 4435,-2735 U4.1@4435,-2615 4440,-2610 4690,-2610 4760,-2540 v1(4760,-2010)
  Bottom Layer w30: Q1.2@4570,-2137.5 4570,-2060 4620,-2010 v1(4760,-2010)
NetQ2_1: Q2.1 R6.1 R8.2 | length 396.3
  Top Layer w40: Q2.1@4030,-2137.5 4030,-2260 R8.2@4060,-2290 4130,-2290 4230,-2390 R6.1@4230,-2410